# EAGLE board pathfinder (EAGLE 9.1.2)
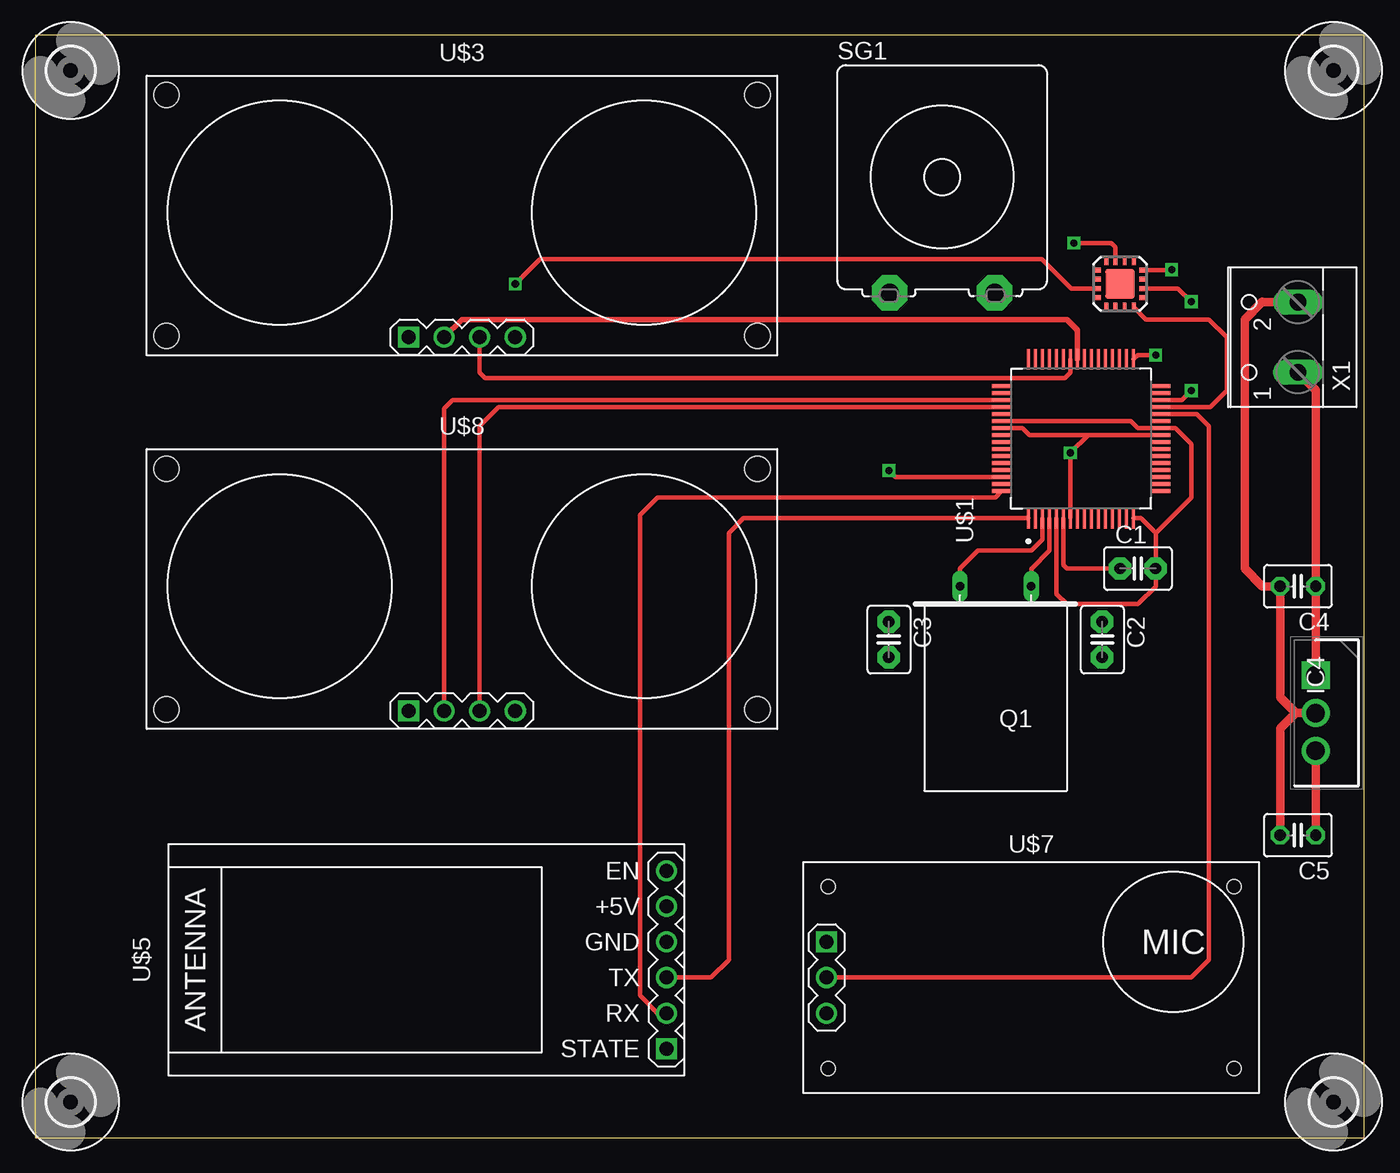
[diagram p0: board, top side]
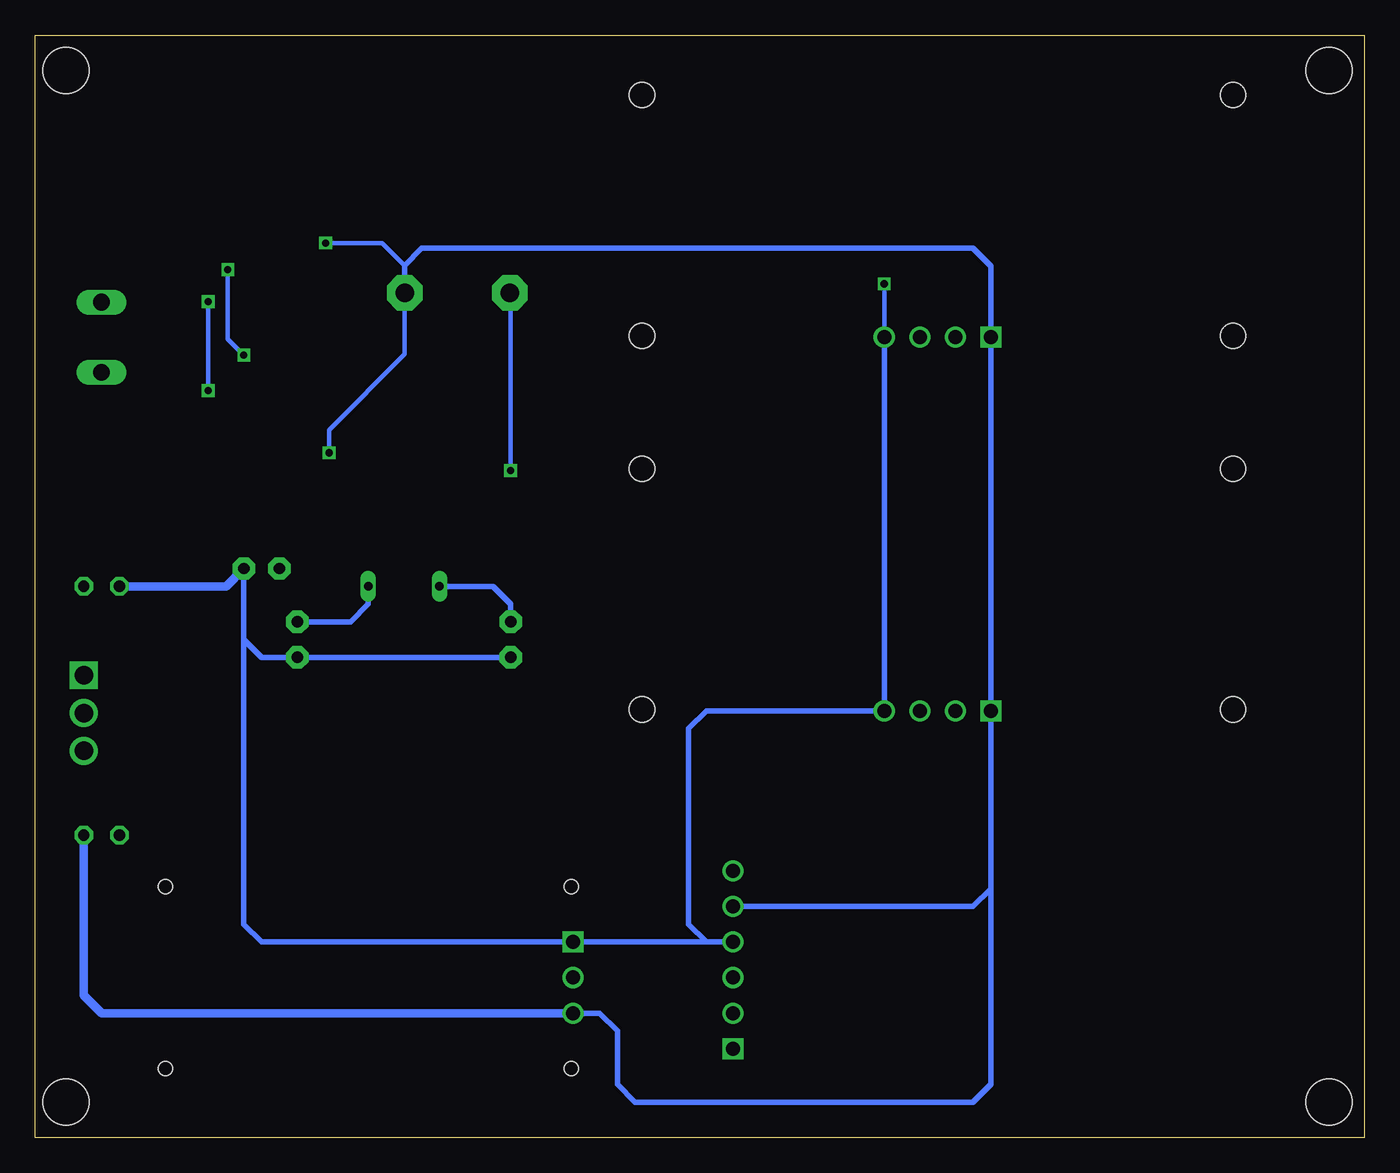
[diagram p1: board, bottom side, seen from below]

Size 94.92 x 78.73 mm. Coordinates in mm from the lower left corner, seen from the top.
Outline: 0,0 94.92,0 94.92,78.73 0,78.73 0,0
Copper layers (1*16): Top 0.035mm / dielectric 1.5mm / Bottom 0.035mm
Design rules "default": minimum track width 6mil, minimum drill 0.35mm, track to track 6mil, track to pad 6mil, pad to pad 6mil, via to via 6mil, smd to smd 6mil, copper to edge 40mil, drill to drill 6mil, minimum pad ring 10mil, minimum via ring 8mil, stop-mask expansion 4mil, vias tented up to drill 0mil, thermal gap 10mil

## Footprints (pad centres in the part's own frame; a part is rotated, then mirrored left to right if it is on the bottom)
C2.5-3 = drill 0.813 pad 1.6 octagon: 1 -1.27,0; 2 1.27,0
C025-030X050 = drill 0.813 octagon: 1 -1.27,0; 2 1.27,0
3,3 = hole 3.3: 0,0
TO270P460X1020X2008-3P = drill 1.32 pad 1.98 square: 1 0,0 | drill 1.32 pad 1.98: 2 2.7,0; 3 5.4,0
Q = drill 0.61 long: 1 -2.54,-7.62; 2 2.54,-7.62
B/C11L = drill 1.321 pad 2.54 octagon: 1 -3.759,-8.255; 2 3.759,-8.255
QFP50P1200X1200X160-64N = smd 1.47 x 0.28: 1 1.061,10.354; 2 1.061,9.854; 3 1.061,9.354; 4 1.061,8.854; 5 1.061,8.354; 6 1.061,7.854; 7 1.061,7.354; 8 1.061,6.854; 9 1.061,6.354; 10 1.061,5.854; 11 1.061,5.354; 12 1.061,4.854; 13 1.061,4.354; 14 1.061,3.854; 15 1.061,3.354; 16 1.061,2.854; 33 12.401,2.854; 34 12.401,3.354; 35 12.401,3.854; 36 12.401,4.354; 37 12.401,4.854; 38 12.401,5.354; 39 12.401,5.854; 40 12.401,6.354; 41 12.401,6.854; 42 12.401,7.354; 43 12.401,7.854; 44 12.401,8.354; 45 12.401,8.854; 46 12.401,9.354; 47 12.401,9.854; 48 12.401,10.354 | smd 0.28 x 1.47: 17 2.981,0.934; 18 3.481,0.934; 19 3.981,0.934; 20 4.481,0.934; 21 4.981,0.934; 22 5.481,0.934; 23 5.981,0.934; 24 6.481,0.934; 25 6.981,0.934; 26 7.481,0.934; 27 7.981,0.934; 28 8.481,0.934; 29 8.981,0.934; 30 9.481,0.934; 31 9.981,0.934; 32 10.481,0.934; 49 10.481,12.274; 50 9.981,12.274; 51 9.481,12.274; 52 8.981,12.274; 53 8.481,12.274; 54 7.981,12.274; 55 7.481,12.274; 56 6.981,12.274; 57 6.481,12.274; 58 5.981,12.274; 59 5.481,12.274; 60 4.981,12.274; 61 4.481,12.274; 62 3.981,12.274; 63 3.481,12.274; 64 2.981,12.274
ULTRASONIC-HC-SR04 = drill 1 square: 1 -3.81,-8.89 | drill 1: 2 -1.27,-8.89; 3 1.27,-8.89; 4 3.81,-8.89 | hole 1.8: -21.1,8.4; -21.1,-8.8; 21.1,-8.8; 21.1,8.4
WIRELESS-BLUETOOTH-HC-05 = drill 1 square: 1 -6.35,-17.145 | drill 1: 2 -3.81,-17.145; 3 -1.27,-17.145; 4 1.27,-17.145; 5 3.81,-17.145; 6 6.35,-17.145
LFCSP16 = smd 0.7 x 0.35: 1 -1.675,0.975; 2 -1.675,0.325; 3 -1.675,-0.325; 4 -1.675,-0.975; 9 1.675,-0.975; 10 1.675,-0.325; 11 1.675,0.325; 12 1.675,0.975 | smd 0.35 x 0.7: 5 -0.975,-1.675; 6 -0.325,-1.675; 7 0.325,-1.675; 8 0.975,-1.675; 13 0.975,1.675; 14 0.325,1.675; 15 -0.325,1.675; 16 -0.975,1.675 | smd 2.1 x 2.1: EXP 0,0
SOUND-DETECTOR = drill 1 square: 1 -14.605,2.54 | drill 1: 2 -14.605,0; 3 -14.605,-2.54 | hole 1: -14.5,6.5; -14.5,-6.5; 14.5,-6.5; 14.5,6.5
W237-102 = drill 1.194 long: 1 -2.5,-1.27; 2 2.5,-1.27

## Placement (x,y rotation side)
C1  [C2.5-3]  78.74,40.64 0 top
C2  18pF  [C2.5-3]  76.2,35.56 270 top
C3  18pF  [C2.5-3]  60.96,35.56 270 top
C4  0,33uf  [C025-030X050]  90.17,39.37 180 top
C5  0,1uf  [C025-030X050]  90.17,21.59 180 top
H1  MOUNT-HOLE3.3  [3,3]  2.54,76.2 0 top
H2  MOUNT-HOLE3.3  [3,3]  92.71,76.2 0 top
H3  MOUNT-HOLE3.3  [3,3]  92.71,2.54 0 top
H4  MOUNT-HOLE3.3  [3,3]  2.54,2.54 0 top
IC4  L7805ABV  [TO270P460X1020X2008-3P]  91.44,33.02 270 top
Q1  [Q]  68.58,31.75 180 top
SG1  B/C11L  [B/C11L]  64.77,68.58 0 top
U$1  XC888  [QFP50P1200X1200X160-64N]  81.28,43.18 90 top
U$3  ULTRASONIC-HC-SR04  [ULTRASONIC-HC-SR04]  30.48,66.04 0 top
U$5  WIRELESS-BLUETOOTH-HC-05  [WIRELESS-BLUETOOTH-HC-05]  27.94,12.7 90 top
U$6  ADXL335  [LFCSP16]  77.47,60.96 0 top
U$7  SOUND-DETECTOR  [SOUND-DETECTOR]  71.12,11.43 0 top
U$8  ULTRASONIC-HC-SR04  [ULTRASONIC-HC-SR04]  30.48,39.37 0 top
X1  [W237-102]  88.9,57.15 90 top

## Library data of the parts
C1-C3 = capacitor-wima
C4 C5 = rcl; SPICEPREFIX: C
H1-H4 = holes
IC4 = L7805ABV; ALLIED_NUMBER: 70013890; ALLIED_PRICE-STOCK: http://www.alliedelec.com/stmicroelectronics-l7805abv/70013890/; DESCRIPTION: Voltage Regulator 5V 1A TO220 L7805ABV, Voltage Regulator, 1A 5 V, 2%, 3-Pin TO-220; HEIGHT: 4.6mm; MANUFACTURER_NAME: STMicroelectronics; MANUFACTURER_PART_NUMBER: L7805ABV; MOUSER_PART_NUMBER: 511-L7805ABV; MOUSER_PRICE-STOCK: https://www.mouser.com/Search/Refine.aspx?Keyword=511-L7805ABV; RS_PART_NUMBER: 6869820P; RS_PRICE-STOCK: http://uk.rs-online.com/web/p/products/6869820P
Q1 = special; X1: 4-12MHz
SG1 = buzzer; OC_FARNELL: unknown; OC_NEWARK: unknown
U$1 = xc888
U$3 U$5 U$8 = ultrasonic
U$6 = adxl335; IC: ADXL335
U$7 = diy-modules (1)
X1 = con-wago-500

## Nets
+5V: C5.1 IC4.3 SG1.2 U$1.7 U$1.25 U$1.55 U$3.1 U$5.5 U$6.15 U$7.3 U$8.1
BOOT: U$1.58
GND: C1.2 C2.2 C3.2 C4.2 C5.2 IC4.2 U$1.5 U$1.16 U$1.26 U$1.54 U$3.4 U$5.4 U$6.3 U$7.1 U$8.4 X1.2
N$1: U$1.33 U$6.12
N$2: U$1.28 U$7.2
N$3: U$1.29 U$6.8
N$4: C4.1 IC4.1 X1.1
N$5: U$1.27
N$6: U$1.24
N$7: U$1.23
N$8: U$1.22
N$9: U$1.11
N$10: U$1.10
N$11: U$1.39
N$12: U$1.38
N$13: U$1.37
N$14: U$1.36
N$15: U$1.35
N$16: U$1.34
N$17: SG1.1 U$1.62
N$19: U$1.1 U$5.3
N$20: U$1.64 U$5.2
N$29: U$1.52 U$8.3
N$31: U$1.41 U$3.2
N$32: U$1.42 U$3.3
N$33: U$1.59
N$34: U$1.60
N$35: U$1.61
N$36: U$1.40
N$37: U$1.45
N$38: U$1.46
N$39: U$1.47
N$40: U$1.48
N$41: U$1.8
N$42: U$1.9
N$43: U$1.12
N$44: U$1.13
N$45: U$1.14
N$46: U$1.15
N$47: U$1.19
N$48: U$1.20
N$49: C3.1 Q1.2 U$1.3
N$50: C2.1 Q1.1 U$1.4
N$52: C1.1 U$1.6
N$67: U$1.51 U$8.2
N$68: U$1.30 U$6.10
RESET: U$1.53
VAREF: U$1.32
VGND: U$1.31

## Tracks (layer width: path | path; a pad name or v marks a point on that pad's centre or on a via)
+5V  (via drill 0.51)
  Top 0.305: U$1.25 75.19,50.16 | 75.19,50.16 75.18,50.16 | U$1.7 v73.93,48.9 75.19,50.16 | U$1.55 70.5,50.66 70.99,50.16 75.18,50.16 | 75.18,50.16 75.19,50.16 | U$6.15 77.14,63.57 76.83,63.88 v74.17,63.88
  Top 0.61: IC4.3 C5.1
  Bottom 0.305: v74.17,63.88 70.13,63.88 68.53,62.28 | v73.93,48.9 73.93,50.53 68.53,55.93 SG1.2
  Bottom 0.406: SG1.2 68.53,62.28 67.31,63.5 27.94,63.5 26.67,62.23 U$3.1 U$8.1 26.67,17.78 | U$5.5 27.94,16.51 26.67,17.78 | U$7.3 54.61,8.89 53.34,7.62 53.34,3.81 52.07,2.54 27.94,2.54 26.67,3.81 26.67,17.78
  Bottom 0.61: U$7.3 90.17,8.89 91.44,10.16 C5.1
GND  (via drill 0.51)
  Top 0.305: U$1.16 78.95,44.24 80.01,43.18 | 80.01,43.18 C1.2 80.01,39.37 78.74,38.1 73.66,38.1 72.93,38.83 U$1.5 | U$1.54 78.24,51.16 78.74,50.66 U$1.26 81.42,50.66 82.55,49.53 82.55,45.72 80.01,43.18 | U$6.3 73.98,60.63 71.88,62.74 36.07,62.74 v34.29,60.96
  Top 0.61: C5.2 88.9,29.21 90.01,30.32 | IC4.2 90.01,30.32 | 90.01,30.32 88.9,31.43 C4.2 87.63,39.37 86.36,40.64 86.36,58.42 87.63,59.69 87.67,59.65 X1.2
  Bottom 0.305: v34.29,60.96 U$3.4
  Bottom 0.406: U$3.4 U$8.4 46.99,30.48 48.26,29.21 48.26,15.24 46.99,13.97 | U$5.4 46.99,13.97 | 46.99,13.97 55.88,13.97 | 55.88,13.97 U$7.1 | C1.2 80.01,35.56 | 80.01,35.56 80.01,15.24 78.74,13.97 55.88,13.97 | C3.2 C2.2 78.74,34.29 80.01,35.56
  Bottom 0.61: C4.2 81.28,39.37 C1.2
N$1  (via drill 0.51)
  Top 0.305: U$1.33 78.72,55.88 v80.01,55.88 | U$6.12 81.11,61.94 v81.15,61.98
  Bottom 0.305: v80.01,55.88 81.15,57.02 v81.15,61.98
N$2
  Top 0.305: U$1.28 82.55,51.66 82.96,51.66 83.82,50.8 83.82,12.7 82.55,11.43 U$7.2
N$3
  Top 0.305: U$1.29 83.91,52.16 85.09,53.34 85.09,57.15 83.82,58.42 79.31,58.42 U$6.8
N$4
  Top 0.61: IC4.1 C4.1 91.44,53.38 X1.1
N$17  (via drill 0.51)
  Top 0.305: U$1.62 61.42,47.16 v60.96,47.62
  Bottom 0.305: v60.96,47.62 60.96,60.27 SG1.1
N$19
  Top 0.305: U$1.1 50.59,44.24 49.53,43.18 49.53,12.7 48.26,11.43 U$5.3
N$20
  Top 0.305: U$5.2 44.45,8.89 43.18,10.16 43.18,44.45 44.45,45.72 68.56,45.72 U$1.64
N$29
  Top 0.305: U$1.52 33.11,52.16 31.75,50.8 U$8.3
N$31
  Top 0.406: U$1.41 74.43,57.65 73.66,58.42 30.48,58.42 U$3.2
N$32
  Top 0.305: U$1.42 73.93,54.62 73.53,54.23 32.13,54.23 31.75,54.61 U$3.3
N$49
  Top 0.305: U$1.3 71.93,42.72 71.12,41.91 67.31,41.91 66.04,40.64 Q1.2
  Bottom 0.406: C3.1 60.96,38.1 62.23,39.37 Q1.2
N$50
  Top 0.305: U$1.4 72.43,41.91 71.16,40.64 71.12,40.64 Q1.1
  Bottom 0.406: C2.1 72.39,36.83 71.12,38.1 Q1.1
N$52
  Top 0.305: U$1.6 73.43,40.87 73.66,40.64 C1.1
N$67
  Top 0.305: U$1.51 29.8,52.66 29.21,52.07 U$8.2
N$68  (via drill 0.51)
  Top 0.305: U$6.10 81.61,60.63 v82.55,59.69 | U$1.30 81.87,52.66 v82.55,53.34
  Bottom 0.305: v82.55,59.69 v82.55,53.34